# Altium PCB catt.PcbDoc
Units mm, origin at the board's own origin, x right, y up, seen from the top; angles counter-clockwise.
Board outline 65 x 56.5 mm, 2 copper layers (Top Layer, Bottom Layer); 44 components, 38 nets, 187 pads, 21 vias.
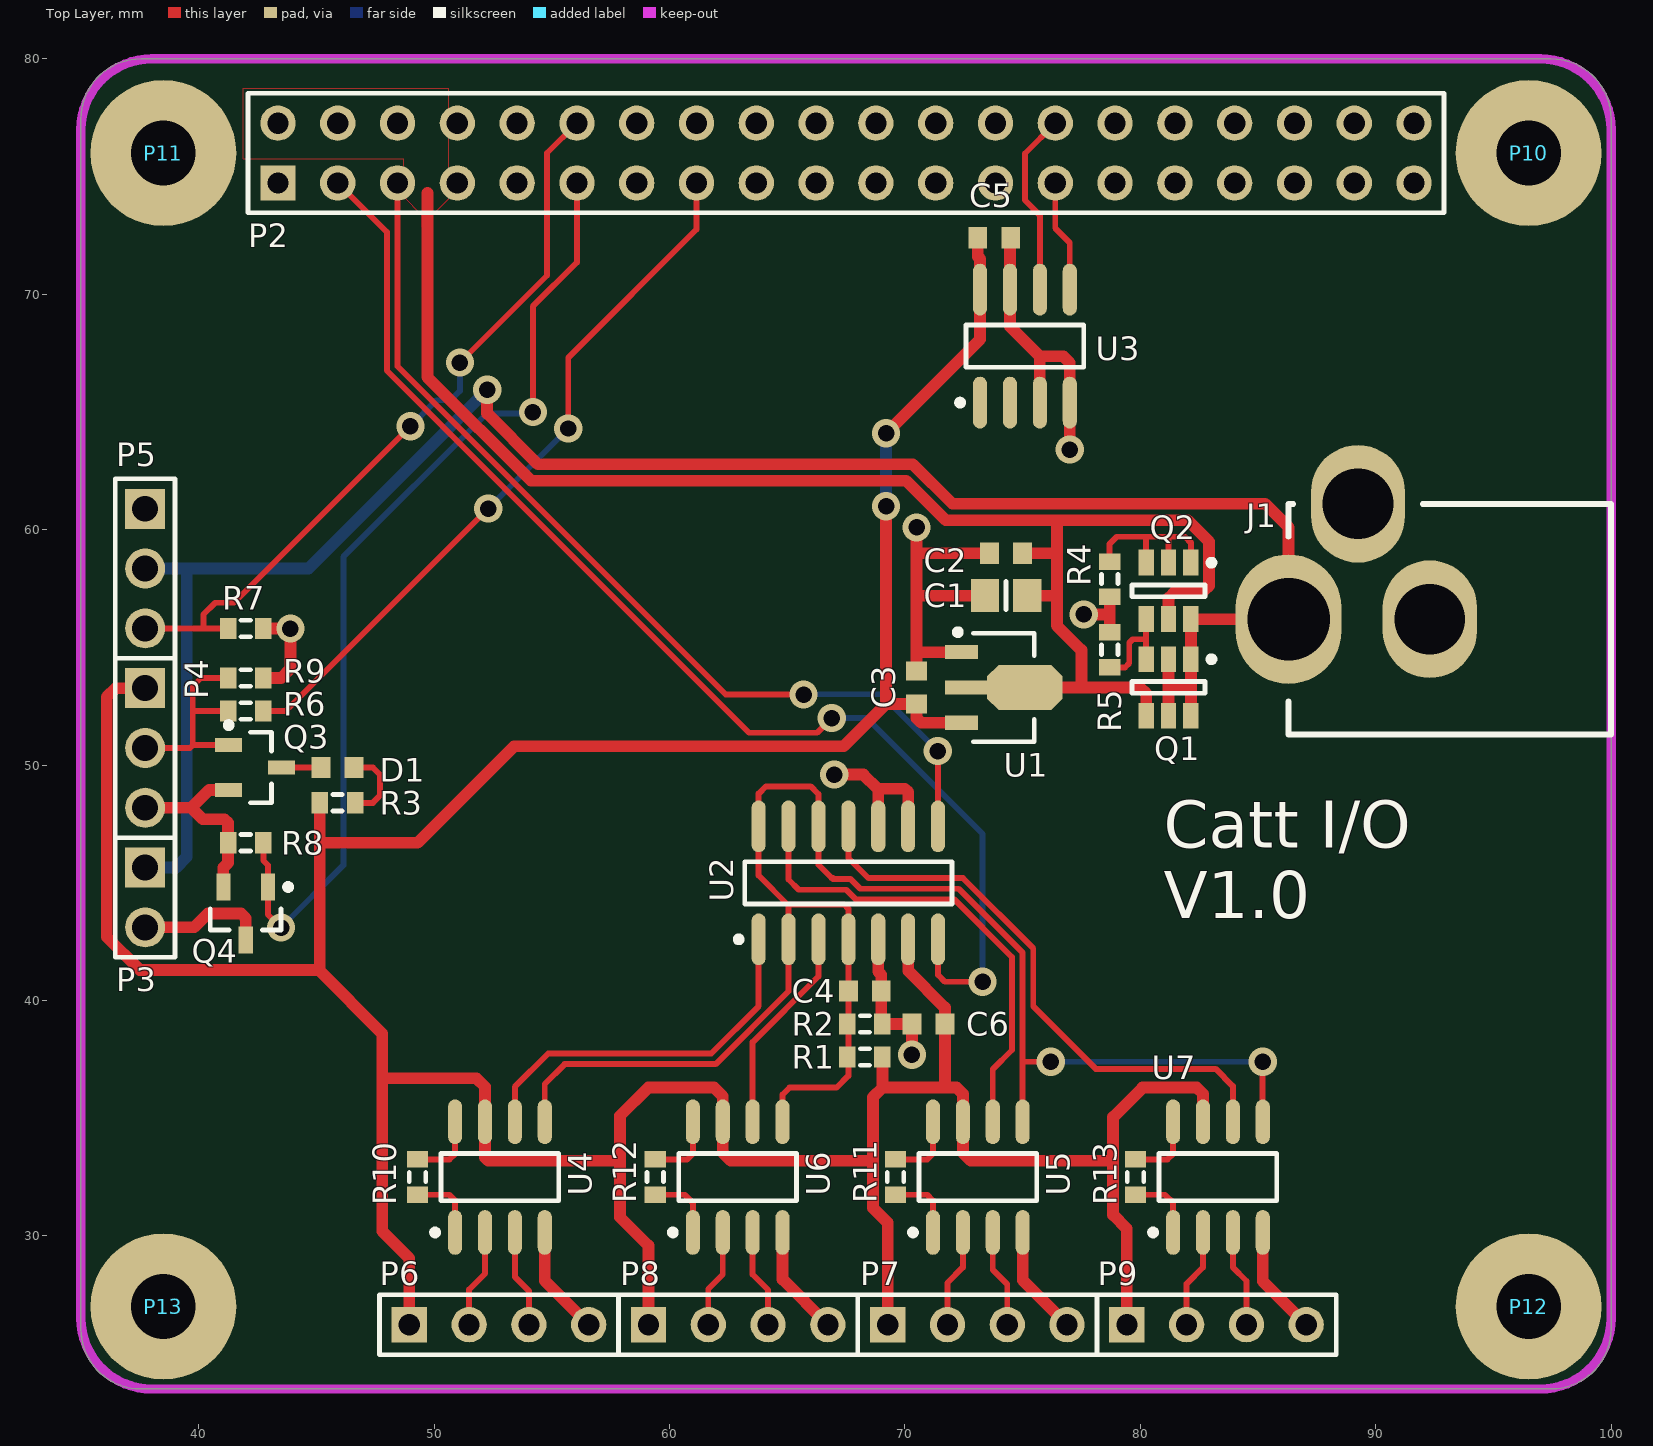
[diagram p0: Top Layer view]
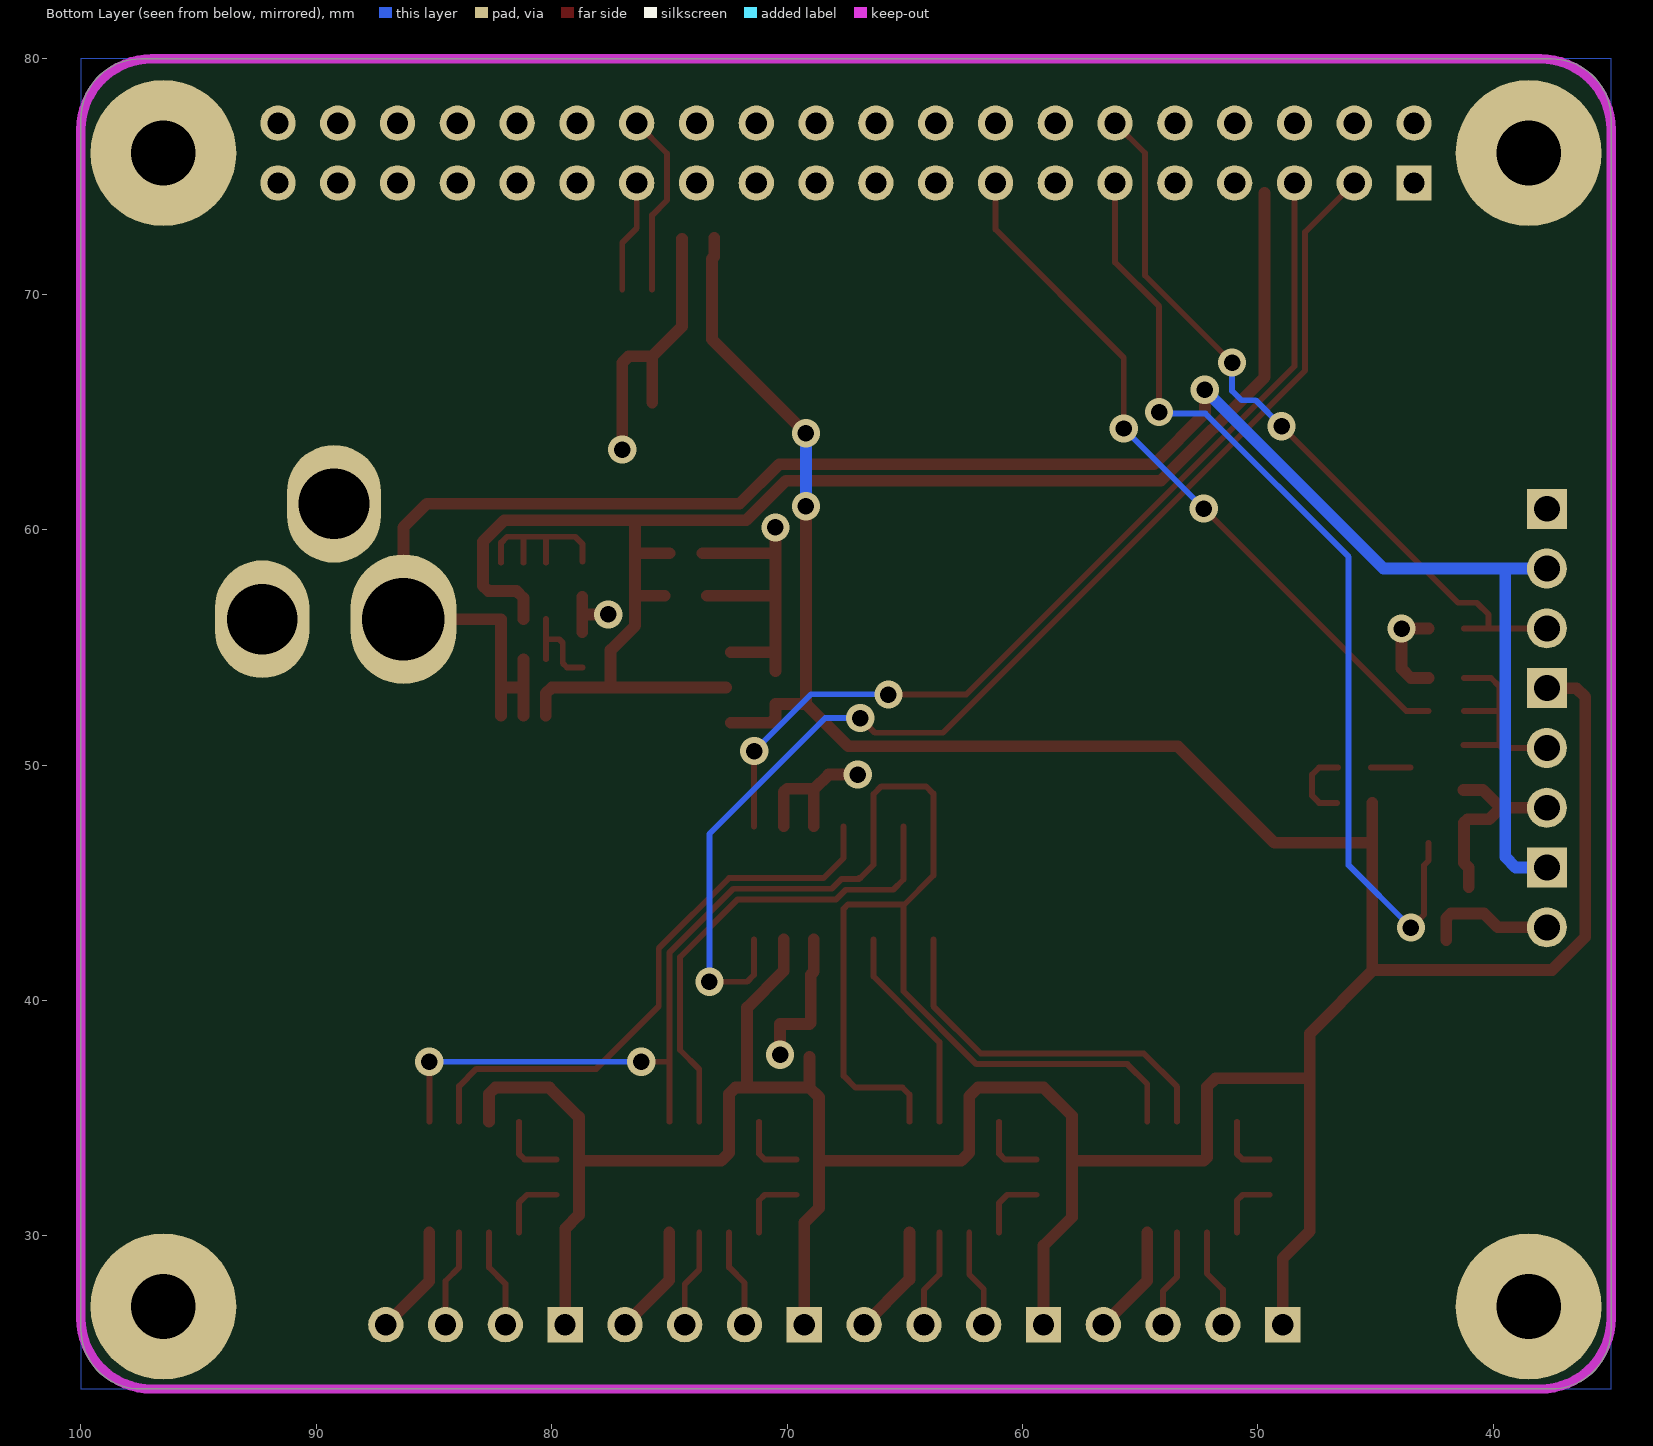
[diagram p1: Bottom Layer view, seen from below]

## Layer stack, top to bottom
Top Layer: signal copper 0.0356
Dielectric: dielectric 0.32, FR-4, Dk 4.8
Bottom Layer: signal copper 0.0356

## Board outline
35,50 35,77.46 cw(c37.54,77.46) 37.54,80 97.46,80 cw(c97.46,77.46) 100,77.46 100,26.04 cw(c97.46,26.04) 97.46,23.5 37.54,23.5 cw(c37.54,26.04) 35,26.04 35,50

## Design rules (kind name [scope] priority, off if disabled: settings)
AssemblyTestPointUsage [All] p0: scope1count=1 scope1_0_kind=Board scope1_0_value=Board scope2count=1 scope2_0_kind=Board scope2_0_value=Board commentlength=0
AssemblyTestpoint [All] p0: scope1count=1 scope1_0_kind=Board scope1_0_value=Board scope2count=1 scope2_0_kind=Board scope2_0_value=Board commentlength=0
Clearance Clearance_1 [All] p0: scope1count=1 scope1_0_kind=Layer scope1_0_value=TOP scope2count=1 scope2_0_kind=Board scope2_0_value=Board commentlength=0 gap=0.4
Clearance [All] p0: scope1count=1 scope1_0_kind=Board scope1_0_value=Board scope2count=1 scope2_0_kind=Board scope2_0_value=Board commentlength=0 gap=0.2
Clearance Clearance_1 [OnLayer('Mechanical 1')] p1: gap=0.4
Clearance [All] p2: gap=0.2
ComponentClearance [All] p0 off: scope1count=1 scope1_0_kind=Board scope1_0_value=Board scope2count=1 scope2_0_kind=Board scope2_0_value=Board commentlength=0 gap=0.254 collisioncheckmode=3
ComponentClearance [All] p1 off: gap=0.254 collisioncheckmode=3 verticalgap=0.254 showdistances=FALSE
DiffPairsRouting [All] p0: scope1count=1 scope1_0_kind=Board scope1_0_value=Board scope2count=1 scope2_0_kind=Board scope2_0_value=Board commentlength=0
FabricationTestPointUsage [All] p0: scope1count=1 scope1_0_kind=Board scope1_0_value=Board scope2count=1 scope2_0_kind=Board scope2_0_value=Board commentlength=0 valid=0 allowmultiple=FALSE
FabricationTestpoint [All] p0: scope1count=1 scope1_0_kind=Board scope1_0_value=Board scope2count=1 scope2_0_kind=Board scope2_0_value=Board commentlength=0 side=3 testpointundercomponent=TRUE minsize=1.016 maxsize=2.54 preferedsize=1.524 minholesize=0 maxholesize=1.016 preferedholesize=0.813 testpointgrid=0.025
FanoutControl Fanout_Default [All] p0: scope1count=1 scope1_0_kind=Board scope1_0_value=Board scope2count=1 scope2_0_kind=Board scope2_0_value=Board commentlength=30 // Fanout_Default (Default Rule)
FanoutControl Fanout_Small [All] p0 off: scope1count=1 scope1_0_kind=Board scope1_0_value=Board scope2count=1 scope2_0_kind=Board scope2_0_value=Board commentlength=84 // Protel DXP Scope 1 Expression Was: (CompPinCount < 5)   Fanout_Small (Default Rule)
FanoutControl Fanout_SOIC [All] p0 off: scope1count=1 scope1_0_kind=Board scope1_0_value=Board scope2count=1 scope2_0_kind=Board scope2_0_value=Board commentlength=71 // Protel DXP Scope 1 Expression Was: IsSOIC   Fanout_SOIC (Default Rule)
FanoutControl Fanout_LCC [All] p0 off: scope1count=1 scope1_0_kind=Board scope1_0_value=Board scope2count=1 scope2_0_kind=Board scope2_0_value=Board commentlength=69 // Protel DXP Scope 1 Expression Was: IsLCC   Fanout_LCC (Default Rule)
FanoutControl Fanout_BGA [All] p0 off: scope1count=1 scope1_0_kind=Board scope1_0_value=Board scope2count=1 scope2_0_kind=Board scope2_0_value=Board commentlength=69 // Protel DXP Scope 1 Expression Was: IsBGA   Fanout_BGA (Default Rule)
Height [All] p0: scope1count=1 scope1_0_kind=Board scope1_0_value=Board scope2count=1 scope2_0_kind=Board scope2_0_value=Board commentlength=0
HoleSize [All] p0: scope1count=1 scope1_0_kind=Board scope1_0_value=Board scope2count=1 scope2_0_kind=Board scope2_0_value=Board commentlength=0 absolutevalues=TRUE maxlimit=3 minlimit=0.3 maxpercent=80.000 minpercent=20.000
HoleSize [All] p1: absolutevalues=TRUE maxlimit=3 minlimit=0.3 maxpercent=80.000 minpercent=20.000
HoleToHoleClearance [All] p0: scope1count=1 scope1_0_kind=Board scope1_0_value=Board scope2count=1 scope2_0_kind=Board scope2_0_value=Board commentlength=0
LayerPairs [All] p0: scope1count=1 scope1_0_kind=Board scope1_0_value=Board scope2count=1 scope2_0_kind=Board scope2_0_value=Board commentlength=0 enforce=TRUE
MinimumSolderMaskSliver [All] p0: scope1count=1 scope1_0_kind=Board scope1_0_value=Board scope2count=1 scope2_0_kind=Board scope2_0_value=Board commentlength=0
NetAntennae [All] p0: scope1count=1 scope1_0_kind=Board scope1_0_value=Board scope2count=1 scope2_0_kind=Board scope2_0_value=Board commentlength=0
PasteMaskExpansion [All] p0: scope1count=1 scope1_0_kind=Board scope1_0_value=Board scope2count=1 scope2_0_kind=Board scope2_0_value=Board commentlength=0 expansion=0
PlaneClearance [All] p0: scope1count=1 scope1_0_kind=Board scope1_0_value=Board scope2count=1 scope2_0_kind=Board scope2_0_value=Board commentlength=0 clearance=0.5
PlaneClearance [All] p1: clearance=0.5
PlaneConnect [All] p0: scope1count=1 scope1_0_kind=Board scope1_0_value=Board scope2count=1 scope2_0_kind=Board scope2_0_value=Board commentlength=0 planeconnectstyle=Relief reliefexpansion=0.5 reliefentries=4 reliefconductorwidth=0.25 reliefairgap=0.25
PlaneConnect [All] p1: planeconnectstyle=Relief reliefexpansion=0.5 reliefentries=4 reliefconductorwidth=0.25 reliefairgap=0.25
PolygonConnect [All] p0: scope1count=1 scope1_0_kind=Board scope1_0_value=Board scope2count=1 scope2_0_kind=Board scope2_0_value=Board commentlength=0 connectstyle=Relief reliefconductorwidth=0.3 reliefentries=4 polygonreliefangle="90 Angle"
PolygonConnect [All] p1: connectstyle=Relief reliefconductorwidth=0.3 reliefentries=4 polygonreliefangle="90 Angle" airgapwidth=0.3
RoomDefinition catt [All] p0: scope1count=1 scope1_0_kind=ComponentClass scope1_0_value=catt scope2count=1 scope2_0_kind=Board scope2_0_value=Board commentlength=0 region_x1=13582677 region_y1=8858268 region_x2=39763780 region_y2=31889764 confinementstyle=ConfineIn
RoomDefinition catt [InComponentClass('catt')] p1: confinementstyle=ConfineIn formatcopy=TRUE lockcomponents=FALSE outline 34.5,22.5 101,22.5 101,81 34.5,81
RoutingCorners [All] p0: scope1count=1 scope1_0_kind=Board scope1_0_value=Board scope2count=1 scope2_0_kind=Board scope2_0_value=Board commentlength=0 cornerstyle=Round minsetback=3 maxsetback=3
RoutingCorners [All] p1: cornerstyle=Round minsetback=3 maxsetback=3
RoutingLayers [All] p0: scope1count=1 scope1_0_kind=Board scope1_0_value=Board scope2count=1 scope2_0_kind=Board scope2_0_value=Board commentlength=0 top layer=Automatic bottom layer=Automatic
RoutingPriority [All] p0: scope1count=1 scope1_0_kind=Board scope1_0_value=Board scope2count=1 scope2_0_kind=Board scope2_0_value=Board commentlength=0
RoutingTopology [All] p0: scope1count=1 scope1_0_kind=Board scope1_0_value=Board scope2count=1 scope2_0_kind=Board scope2_0_value=Board commentlength=0 topology=Shortest
RoutingVias [All] p0: scope1count=1 scope1_0_kind=Board scope1_0_value=Board scope2count=1 scope2_0_kind=Board scope2_0_value=Board commentlength=0 holewidth=0.7 width=1.2 viastyle="Through Hole" minholewidth=0.7 minwidth=1.2 maxholewidth=0.7 maxwidth=1.2
RoutingVias [All] p1: holewidth=0.7 width=1.2 viastyle="Through Hole" minholewidth=0.7 minwidth=1.2 maxholewidth=0.7 maxwidth=1.2
ShortCircuit [All] p0: scope1count=1 scope1_0_kind=Board scope1_0_value=Board scope2count=1 scope2_0_kind=Board scope2_0_value=Board commentlength=0 allowed=FALSE
SilkToSilkClearance [All] p0: scope1count=1 scope1_0_kind=Board scope1_0_value=Board scope2count=1 scope2_0_kind=Board scope2_0_value=Board commentlength=0
SilkToSilkClearance [All] p1: silktosilkclearance=0.178
SilkToSolderMaskClearance [All] p0 off: scope1count=1 scope1_0_kind=Board scope1_0_value=Board scope2count=1 scope2_0_kind=Board scope2_0_value=Board commentlength=44 // Protel DXP Scope 1 Expression Was: IsPad
SilkToSolderMaskClearance [IsPad] p1: minsilkscreentomaskgap=0.178 clearancetoexposedcopper=TRUE
SolderMaskExpansion [All] p0: scope1count=1 scope1_0_kind=Board scope1_0_value=Board scope2count=1 scope2_0_kind=Board scope2_0_value=Board commentlength=0 expansion=0.1
SolderMaskExpansion [All] p1: expansion=0.1
UnRoutedNet [All] p0: scope1count=1 scope1_0_kind=Board scope1_0_value=Board scope2count=1 scope2_0_kind=Board scope2_0_value=Board commentlength=0
Width Width-power [All] p0 off: scope1count=1 scope1_0_kind=Board scope1_0_value=Board scope2count=1 scope2_0_kind=Board scope2_0_value=Board commentlength=101 maxlimit=1 minlimit=0.3 preferedwidth=0.5 // Protel DXP Scope 1 Expression Was: (InNet('GND') OR InNet('V5V') OR InNet('Vin') OR InNet('VCC'))
Width [All] p0: scope1count=1 scope1_0_kind=Board scope1_0_value=Board scope2count=1 scope2_0_kind=Board scope2_0_value=Board commentlength=0 maxlimit=2 minlimit=0.2 preferedwidth=0.25
Width Width-power [(InNet('GND') OR InNet('V5V') OR InNet('Vin') OR InNet('VCC'))] p1: maxlimit=1 minlimit=0.3 preferedwidth=0.5
Width [All] p2: maxlimit=2 minlimit=0.2 preferedwidth=0.25
21 further rules are at their usual default settings.

## Components (designator, comment, footprint, x,y, rotation, side; value= is the part's Value field where it differs from the comment)
C1 "Cap Pol2" 6-0805_N 74.3,57.2 r180 top
C2 "Cap" 1608[0603] 74.3,59 r0 top
C3 "Cap" 1608[0603] 70.5,53.3 r270 top
C4 "Cap" 1608[0603] 68.3,40.4 r180 top
C5 "Cap" 1608[0603] 73.8,72.4 r180 top
C6 "Cap" 1608[0603] 71,39 r0 top
D1 "LED1" 1608[0603] 45.9,49.9 r180 top
J1 "PWR2.5" MJ-180PH 100,56.2 r180 top
P2 "Header 20X2" HDR2X20 43.37,74.73 r0 top
P3 "Header 2" HDR1X2 37.73,45.65 r270 top
P4 "Header 3" HDR1X3 37.73,53.27 r270 top
P5 "Header 3" HDR1X3 37.73,60.89 r270 top
P6 "Header 4" HDR1X4 48.95,26.23 r0 top
P7 "Header 4" HDR1X4 69.27,26.23 r0 top
P8 "Header 4" HDR1X4 59.11,26.23 r0 top
P9 "Header 4" HDR1X4 79.43,26.23 r0 top
P10 "HOLE" HOLE#1 96.5,76.5 r0 top
P11 "HOLE" HOLE#1 38.5,76.5 r0 top
P12 "HOLE" HOLE#2 96.5,27 r0 top
P13 "HOLE" HOLE#3 39,27.5 r0 top
Q1 "FDC365P" SOT23-6 81.2,53.3 r270 top
Q2 "DMMT5401" SOT23-6 81.2,57.4 r270 top
Q3 "FDN335N" SOT-23 42.4,49.9 r0 top
Q4 "FDN335N" SOT-23 42,43.7 r270 top
R1 "Res2" J1-0603 68.3,37.6 r0 top
R2 "Res2" J1-0603 68.3,39 r180 top
R3 "Res2" J1-0603 45.9,48.4 r180 top
R4 "Res2" J1-0603 78.7,57.9 r90 top
R5 "Res2" J1-0603 78.7,54.9 r270 top
R6 "Res2" J1-0603 42,52.3 r0 top
R7 "Res2" J1-0603 42,55.8 r0 top
R8 "Res2" J1-0603 42,46.7 r180 top
R9 "Res2" J1-0603 42,53.7 r0 top
R10 "Res2" J1-0603 49.3,32.5 r270 top
R11 "Res2" J1-0603 69.6,32.5 r270 top
R12 "Res2" J1-0603 59.4,32.5 r270 top
R13 "Res2" J1-0603 79.8,32.5 r270 top
U1 "MCP1702T-3302E/MB" SOT-89-MB3_N 74.2,53.3 r0 top
U2 "MCP3424-E/SL" SOIC-SL14_N 67.6,45 r90 top
U3 "AT24C08BN-SP25-T" 8S1_N 75.1,67.8 r90 top
U4 "AD620AN" SO-8_L 52.8,32.5 r90 top
U5 "AD620AN" SO-8_L 73.1,32.5 r90 top
U6 "AD620AN" SO-8_L 62.9,32.5 r90 top
U7 "AD620AN" SO-8_L 83.3,32.5 r90 top

## Footprints (in the part's own frame and the unit in brackets; to place one, negate y for a bottom-side part, rotate by r counter-clockwise, add the part's x,y. Pads: shape width x height; smd on the part's side, far side on the other; paste and mask are expansions set on the pad)
6-0805_N [mm] "Chip Resistor, Body 2.0x1.2mm, IPC Medium Density"
  rect 1.2x1.4 smd: 1(-0.9,0) 2(0.9,0)
  silkscreen extent 0,-0.6 0,0.6
8S1_N [mm] "SOIC, 8-Leads, Body 4.9x3.9mm, Pitch 1.27mm, IPC Medium Density"
  oval 2.2x0.6 smd: 1(-2.4,1.905) 2(-2.4,0.635) 3(-2.4,-0.635) 4(-2.4,-1.905) 5(2.4,-1.905) 6(2.4,-0.635) 7(2.4,0.635) 8(2.4,1.905)
  silkscreen extent -2.52,-2.5 0.9,2.88
1608[0603] [mm] "Chip Capacitor, Body 1.6x0.8mm, IPC High Density"
  rect 0.8x0.9 smd: 1(-0.7,0) 2(0.7,0)
HDR1X2 [mm] "Connector; Header; 2 Position"
  rect 1.7x1.7 hole 1.1: 1(0,0)
  round 1.7 hole 1.1: 2(2.54,0)
  silkscreen extent -1.27,-1.27 3.81,1.27
HDR1X3 [mm] "Connector; Header; 3 Position"
  rect 1.7x1.7 hole 1.1: 1(0,0)
  round 1.7 hole 1.1: 2(2.54,0) 3(5.08,0)
  silkscreen extent -1.27,-1.27 6.35,1.27
HDR1X4 [mm] "Connector; Header; 4 Position"
  rect 1.5x1.5 hole 0.9: 1(0,0)
  round 1.5 hole 0.9: 2(2.54,0) 3(5.08,0) 4(7.62,0)
  silkscreen extent -1.27,-1.27 8.89,1.27
HDR2X20 [mm] "Connector; Header; 20x2 Position"
  rect 1.5x1.5 hole 0.9: 1(0,0)
  round 1.5 hole 0.9: 2(0,2.54) 3(2.54,0) 4(2.54,2.54) 5(5.08,0) 6(5.08,2.54) 7(7.62,0) 8(7.62,2.54) 9(10.16,0) 10(10.16,2.54) 11(12.7,0) 12(12.7,2.54) 13(15.24,0) 14(15.24,2.54) 15(17.78,0) 16(17.78,2.54) 17(20.32,0) 18(20.32,2.54) 19(22.86,0) 20(22.86,2.54) 21(25.4,0) 22(25.4,2.54) 23(27.94,0) 24(27.94,2.54) 25(30.48,0) 26(30.48,2.54) 27(33.02,0) 28(33.02,2.54) 29(35.56,0) 30(35.56,2.54) 31(38.1,0) 32(38.1,2.54) 33(40.64,0) 34(40.64,2.54) 35(43.18,0) 36(43.18,2.54) 37(45.72,0) 38(45.72,2.54) 39(48.26,0) 40(48.26,2.54)
  silkscreen extent -1.27,-1.27 49.53,3.81
HOLE#1 [mm] "2.75mm mounting hole"
  round 6.2 hole 2.75: 0(0,-0.5)
HOLE#2 [mm] "2.75mm mounting hole"
  round 6.2 hole 2.75: 0(0,0)
HOLE#3 [mm] "2.75mm mounting hole"
  round 6.2 hole 2.75: 0(-0.5,-0.5)
J1-0603 [mm] "Chip Resistor, Body 1.6x0.8mm, IPC High Density"
  rect 0.7x0.9 smd: 1(-0.75,0) 2(0.75,0)
  silkscreen extent -0.2,-0.35 0.2,0.35
MJ-180PH [mm] "Socket, PCB, DC Power"
  oval 4.5x5.5 hole 3.5: 1(13.7,0)
  oval 4x5 hole 3: 2(10.75,-4.9) 3(7.7,0)
  silkscreen extent 0,-4.9 13.7,4.9
SO-8_L [mm] "SOIC, 8-Leads, Body 4.9x3.9mm, Pitch 1.27mm, IPC High Density"
  oval 1.9x0.6 smd: 1(-2.35,1.905) 2(-2.35,0.635) 3(-2.35,-0.635) 4(-2.35,-1.905) 5(2.35,-1.905) 6(2.35,-0.635) 7(2.35,0.635) 8(2.35,1.905)
  silkscreen extent -2.47,-2.5 1,2.88
SOIC-SL14_N [mm] "SOIC, 14-Leads, Body 8.7x3.9mm, Pitch 1.27mm, IPC Medium Density"
  oval 2.2x0.6 smd: 1(-2.4,3.81) 2(-2.4,2.54) 3(-2.4,1.27) 4(-2.4,0) 5(-2.4,-1.27) 6(-2.4,-2.54) 7(-2.4,-3.81) 8(2.4,-3.81) 9(2.4,-2.54) 10(2.4,-1.27) 11(2.4,0) 12(2.4,1.27) 13(2.4,2.54) 14(2.4,3.81)
  silkscreen extent -2.52,-4.4 0.9,4.78
SOT23-6 [mm] "SOT23, 6-Leads, Body 2.9x1.6mm, Pitch 0.95mm, Lead Span 2.7mm, IPC Medium Density"
  rect 1.1x0.65 smd: 1(-1.2,0.95) 2(-1.2,0) 3(-1.2,-0.95) 4(1.2,-0.95) 5(1.2,0) 6(1.2,0.95)
  silkscreen extent -1.32,-1.55 0.25,1.95
SOT-23 [mm] "SOT23, 3-Leads, Body 2.9x1.3mm, Pitch 0.95mm, Lead Span 2.5mm, IPC Medium Density"
  rect 1.15x0.6 smd: 1(-1.125,0.95) 2(-1.125,-0.95) 3(1.125,0)
  silkscreen extent -1.25,-1.5 0.7,1.92
SOT-89-MB3_N [mm] "SOT89, 3-Leads, Body 4.5x2.4 mm, Pitch 1.5mm, Lead Span 4.1mm, IPC Medium Density"
  rect 1.4x0.6 smd: 1(-1.8,1.5) 3(-1.8,-1.5)
  rect 1.8x0.6 smd: 2(-1.6,0)
  oct 3.2x1.9 smd: 2(0.9,0)
  silkscreen extent -2.07,-2.3 1.3,2.47

## Part data
C1: "Polarized Capacitor (Axial)"
C2 C3 C4 C5 C6: "Capacitor"
D1: "Typical RED GaAs LED"
J1: "Low Voltage Power Supply Connector"
P2: "Header, 20-Pin, Dual row"
P3: "Header, 2-Pin"
P4 P5: "Header, 3-Pin"
P6 P7 P8 P9: "Header, 4-Pin"
P10 P11 P12 P13: "Mountiong Hole"
Q1: "P-Channel PowerTrench® MOSFET"
Q2: "Matched PNP small signal transistor"
Q3 Q4: "N-Channel MOSFET"
R1 R2 R3 R4 R5 R6 R7 R8 R9 R10 R11 R12 R13: "Resistor"
U1: "250 mA Low Quiescent Current LDO Regulator, 3-Pin SOT-89, Extended Temperature, Tape and Reel"
U2: "18-Bit, 4-Channel Analog-to-Digital Converter with I2C Interface and On-Board Reference, 14-Pin SOIC 150mil, Extended Temperature"
U3: "8Kbit (1024 x 8), 2-wire Bus Automotive Serial EEPROM with Write Protect, 2.5V, 8-Pin SOIC, Tape & Reel"
U4 U5 U6 U7: "Low-Cost, Low-Power Instrumentation Amplifier"

## Via types
v1: diameter 1.2, hole 0.7, Top Layer to Bottom Layer, 21 vias

## Nets (pads, with @x,y where several pads share a name; then routed paths per layer and width w, separated by ;. In a path a pad name is that pad's centre, name@x,y a point inside that pad or via, vN(x,y) a via of type N, cw(c..) or ccw(c..) an arc to the next point about the centre after c; other vN are vias at no path point)
GND: C1.2 C2.1 C3.1 C4.1 C5.1 C6.1 J1.2 J1.3 P2.6 P2.9 P2.14 P2.20 P2.25 P2.30 P2.34 P2.39 P4.3 P5.1 P6.4 P7.4 P8.4 P9.4 P10.0 P11.0 P12.0 P13.0 Q3.2 Q4.2 R2.1 R4.1 R5.1 R7.2 R8.2 R9.2 U1.1 U2.5 U2.9 U2.10 U3.3 U3.4 U3.7 U4.4 U5.4 U6.4 U7.4 | length 73.9
  Top Layer w0.5: P4.3 39.69,48.19 ; Q4.2 41.05,45.65 41.25,45.85 R8.2 41.25,47.55 41.1,47.7 40.18,47.7 39.69,48.19 ; Q3.2 40.45,48.95 39.69,48.19 ; R9.2 43.5,53.7 43.9,54.1 v1(43.9,55.8) R7.2 ; U4.4 54.705,28.095 P6.4 ; U6.4 64.805,28.155 P8.4 ; v1(67,49.6) 68.24,49.6 68.84,49 ; U2.5 68.87,41.23 69,41.1 C4.1 69,39.05 R2.1 C6.1 v1(70.3,37.7) ; U2.10 68.87,48.97 68.84,49 ; U2.9 70.14,48.86 70,49 68.84,49 ; C3.1 70.5,54.8 ; 70.5,57.2 C1.2 ; v1(70.5,60.1) 70.5,59 ; U1.1 70.5,54.8 ; C2.1 70.5,59 ; C5.1@74.465,72.365 U3.7 74.465,68.635 75.735,67.365 ; U5.4 75.005,28.115 P7.4 ; U3.3 75.735,67.365 ; v1(77.005,63.405) U3.4 77.005,67.095 76.735,67.365 75.735,67.365 ; v1(77.6,56.4) 78.7,56.4 ; R5.1 78.7,56.4 ; R4.1 78.7,56.4 ; U7.4 85.205,28.075 P9.4 ; 70.5,54.8 70.5,59
  Bottom Layer w0.25: v1@66.7,49.9 v1(67,49.6) ; v1@76.9,63.3 v1(77.005,63.405)
ID_SC: P2.28 U3.6 | length 7.9
  Top Layer w0.25: U3.6 75.735,73.365 75.1,74 75.1,75.98 P2.28
ID_SD: P2.27 U3.5 | length 5.3
  Top Layer w0.25: P2.27@76.39,75.23 76.39,72.81 77.005,72.195 U3.5
IR: P2.11 Q4.1 R8.1 | length 42.4
  Top Layer w0.25: R8.1 42.75,45.95 42.95,45.75 Q4.1 42.95,43.65 v1(43.5,43.1) ; v1(54.2,65) 54.2,69.487 56.07,71.357 P2.11@56.07,75.23
  Bottom Layer w0.25: v1(43.5,43.1) 46.15,45.75 46.15,48.9 46.15,58.85 52.23,64.93 54.13,64.93 v1(54.2,65)
NetD1_1: D1.1 R3.1 | length 3.3
  Top Layer w0.25: D1.1 47.4,49.9 47.7,49.6 47.7,48.7 47.4,48.4 R3.1
NetD1_2: D1.2 Q3.3 | length 1.7
  Top Layer w0.25: Q3.3 D1.2
NetP3_2: P3.2 Q4.3 | length 5.5
  Top Layer w0.5: P3.2 39.81,43.11 40.4,43.7 41.8,43.7 42,43.5 Q4.3
NetP4_2: P4.2 Q3.1 R6.1 R9.1 | length 9.2
  Top Layer w0.25: P4.2 39.63,50.73 39.75,50.85 ; R6.1 39.75,52.3 ; R9.1 40.1,53.7 39.75,53.35 39.75,52.3 ; Q3.1 39.75,50.85 ; 39.75,50.85 39.75,52.3
NetP6_2: P6.2 U4.2 | length 4.2
  Top Layer w0.25: P6.2 51.49,27.725 52.165,28.4 U4.2
NetP6_3: P6.3 U4.3 | length 4.2
  Top Layer w0.25: U4.3 53.435,28.265 54.03,27.67 P6.3
NetP7_2: P7.2 U5.2 | length 4.2
  Top Layer w0.25: P7.2 71.81,28.01 72.465,28.665 U5.2
NetP7_3: P7.3 U5.3 | length 4.2
  Top Layer w0.25: U5.3 73.735,28.565 74.35,27.95 P7.3
NetP8_2: P8.2 U6.2 | length 4.2
  Top Layer w0.25: P8.2 61.65,27.75 62.265,28.365 U6.2
NetP8_3: P8.3 U6.3 | length 4.2
  Top Layer w0.25: U6.3 63.535,28.365 64.19,27.71 P8.3
NetP9_2: P9.2 U7.2 | length 4.2
  Top Layer w0.25: P9.2 81.97,27.97 82.665,28.665 U7.2
NetP9_3: P9.3 U7.3 | length 4.2
  Top Layer w0.25: U7.3 83.935,28.665 84.51,28.09 P9.3
NetQ1_3: Q1.3 Q2.4 R5.2 | length 4.3
  Top Layer w0.25: R5.2 79.35,54.15 79.531,54.331 79.531,55.202 79.679,55.35 80.25,55.35 ; Q1.3 80.25,55.35 ; Q2.4 80.25,55.35
NetQ2_1: Q2.1 Q2.2 Q2.3 R4.2 | length 7.5
  Top Layer w0.25: R4.2 78.7,59.4 79,59.7 80.25,59.7 ; Q2.3 80.25,59.7 ; Q2.2 81.2,59.7 ; Q2.1 82.15,59.45 81.9,59.7 81.2,59.7 ; 80.25,59.7 81.2,59.7
NetR10_1: R10.1 U4.8 | length 2.9
  Top Layer w0.25: R10.1@49.5,33.25 50.65,33.25 50.895,33.495 U4.8
NetR10_2: R10.2 U4.1 | length 2.9
  Top Layer w0.25: R10.2@49.5,31.75 50.65,31.75 50.895,31.505 U4.1
NetR11_1: R11.1 U5.8 | length 3.1
  Top Layer w0.25: R11.1 70.95,33.25 71.195,33.495 U5.8
NetR11_2: R11.2 U5.1 | length 3.1
  Top Layer w0.25: R11.2 70.95,31.75 71.195,31.505 U5.1
NetR12_1: R12.1 U6.8 | length 3.1
  Top Layer w0.25: R12.1 60.75,33.25 60.995,33.495 U6.8
NetR12_2: R12.2 U6.1 | length 3
  Top Layer w0.25: R12.2 60.65,31.75 60.995,31.405 U6.1
NetR13_1: R13.1 U7.8 | length 3.1
  Top Layer w0.25: R13.1 81.15,33.25 81.395,33.495 U7.8
NetR13_2: R13.2 U7.1 | length 3
  Top Layer w0.25: R13.2 81.05,31.75 81.395,31.405 U7.1
PIRS: P2.15 R6.2 | length 30.7
  Top Layer w0.25: R6.2 43.7,52.3 v1(52.3,60.9) ; v1(55.7,64.3) 55.7,67.308 61.15,72.758 P2.15@61.15,75.23
  Bottom Layer w0.25: v1(52.3,60.9) v1@55.4,64
SCL: P2.5 U2.8 | length 41.2
  Top Layer w0.25: P2.5@48.45,75.23 48.45,66.944 62.394,53 v1(65.7,53) ; v1(71.4,50.6) 71.41,50.59 U2.8
  Bottom Layer w0.25: v1(65.7,53) 65.714,53.014 68.986,53.014 v1(71.4,50.6)
SDA: P2.3 U2.7 | length 52.6
  Top Layer w0.25: P2.3 48,72.64 48,66.757 63.382,51.375 66.275,51.375 v1(66.9,52) ; U2.7 71.41,41.09 71.7,40.8 v1(73.3,40.8)
  Bottom Layer w0.25: v1(66.9,52) 68.382,52 73.3,47.082 v1(73.3,40.8)
SERVO: P2.12 P5.3 R7.1 | length 32.4
  Top Layer w0.25: P5.3 40.2,55.81 ; R7.1@41.24,55.81 40.2,55.81 ; v1(49,64.4) 41.5,56.9 40.7,56.9 40.2,56.4 40.2,55.81 ; v1(51.1,67.1) 54.8,70.8 54.8,76 P2.12
  Bottom Layer w0.25: v1(49,64.4) 50.1,65.5 50.7,65.5 51.1,65.9 v1(51.1,67.1)
V5V: C1.1 C2.2 P2.2 P2.4 Q1.4 Q2.5 U1.2 | length 67.5
  Top Layer w0.5: 49.72,74.3 49.72,66.487 54.122,62.085 70.05,62.085 71.734,60.4 82.013,60.4 82.925,59.488 82.925,57.625 82.7,57.4 81.5,57.4 81.2,57.1 Q2.5 ; U1.2@72.6,53.3 U1.2@75.1,53.3 ; C2.2 76.461,59 ; U1.2@75.104,53.296 77.5,53.296 ; C1.1 76.461,57.2 ; 76.461,60.361 76.461,55.928 77.5,54.889 77.5,53.296 ; Q1.4 80.25,53.05 80.004,53.296 77.5,53.296
VCC: C3.2 C5.2 C6.2 P4.1 P6.1 P7.1 P8.1 P9.1 R1.2 R3.2 U1.3 U2.6 U3.8 U4.7 U5.7 U6.7 U7.7 | length 179.8
  Top Layer w0.5: P4.1 36.47,53.27 36.1,52.9 36.1,42.7 37.5,41.3 45.1,41.3 ; R3.2 45.15,46.7 ; P6.1 48.95,29.05 47.8,30.2 47.8,36.7 ; P8.1 59.11,29.59 57.9,30.8 57.9,33.2 ; R1.2 69.05,36.3 ; v1(69.2,61) 69.2,52.6 ; v1(69.2,64.1) 73.195,68.095 U3.8 73.195,71.505 73.1,71.6 C5.2 ; P7.1 69.27,30.567 68.646,31.191 68.646,33.2 ; U2.6 70.14,41.26 71.7,39.7 C6.2 71.7,36.304 ; U1.3 70.7,51.8 70.5,52 C3.2 69.2,52.6 ; P9.1 79.43,30.312 78.846,30.896 78.846,33.2 ; U7.7 82.665,36.035 82.396,36.304 80.1,36.304 78.846,35.05 78.846,33.2 ; 45.1,41.3 47.8,38.6 47.8,36.7 ; 45.1,41.3 45.15,41.35 45.15,46.7 ; 45.15,46.7 49.3,46.7 53.4,50.8 67.4,50.8 69.2,52.6 ; 47.8,36.7 51.8,36.7 52.165,36.335 U4.7 52.165,33.335 52.3,33.2 57.9,33.2 ; 57.9,33.2 57.9,35.104 59.1,36.304 61.896,36.304 62.265,35.935 U6.7 62.265,33.535 62.6,33.2 68.646,33.2 ; 68.646,33.2 68.646,35.896 69.05,36.3 ; 69.05,36.3 69.054,36.304 72.196,36.304 72.465,36.035 U5.7 72.465,33.535 72.8,33.2 78.846,33.2
  Bottom Layer w0.5: v1(69.2,61) v1(69.2,64.1)
VIN: J1.1 P3.1 P5.2 Q1.1 Q1.2 Q1.5 Q1.6 Q2.6 | length 84.4
  Top Layer w0.5: v1(52.256,65.944) 52.256,64.941 54.412,62.785 70.339,62.785 72.024,61.1 85.3,61.1 86.3,60.1 J1.1 Q2.6 Q1.1 82.15,53.3 ; Q1.5 81.2,53.3 ; Q1.2 81.2,53.3 ; Q1.6 82.15,53.3 ; 81.2,53.3 82.15,53.3
  Bottom Layer w0.5: P3.1 39.05,45.65 39.5,46.1 39.5,58.35 ; P5.2 39.5,58.35 ; v1(52.256,65.944) 44.662,58.35 39.5,58.35
VLC0: U2.1 U4.6 | length 16.1
  Top Layer w0.25: U4.6 53.435,36.335 54.85,37.75 61.777,37.75 63.79,39.763 U2.1
VLC1: U2.3 U6.6 | length 8.9
  Top Layer w0.25: U6.6 63.535,38.235 66.33,41.03 U2.3
VLC2: U2.11 U7.6 | length 24.7
  Top Layer w0.25: U2.11 67.6,46.055 68.455,45.2 72.473,45.2 75.455,42.218 75.455,39.753 78.108,37.1 83.2,37.1 83.935,36.365 U7.6
VLC3: U2.13 U5.6 | length 20.5
  Top Layer w0.25: U2.13 65.06,45.14 65.492,44.708 67.51,44.708 67.918,44.3 72.1,44.3 74.555,41.845 74.555,37.9 73.735,37.08 U5.6
VREF: C4.2 R1.1 R2.2 U2.2 U2.4 U2.12 U2.14 U4.5 U5.5 U6.5 U7.5 | length 72.5
  Top Layer w0.25: U4.5 54.705,36.455 55.55,37.3 61.964,37.3 65.06,40.396 U2.2 65.06,44.04 ; U6.5 64.805,36.005 65.1,36.3 67.1,36.3 67.6,36.8 C4.2 U2.4 67.6,43.9 67.421,44.079 65.099,44.079 65.06,44.04 ; 66.942,45.158 67.697,45.158 68.105,44.75 72.286,44.75 75.005,42.031 75.005,37.4 ; 66.942,45.212 66.888,45.212 66.33,45.77 U2.12 66.33,48.77 66,49.1 64.1,49.1 63.79,48.79 U2.14 63.79,45.31 65.06,44.04 ; U5.5 75.005,37.4 ; v1@75.9,37.4 75.005,37.4 ; v1(85.2,37.4) 85.2,34.855 U7.5
  Bottom Layer w0.25: v1@75.9,37.4 v1(85.2,37.4)
  other v1: 76.2,37.4
pads on no net: P2.1 P2.7 P2.8 P2.10 P2.13 P2.16 P2.17 P2.18 P2.19 P2.21 P2.22 P2.23 P2.24 P2.26 P2.29 P2.31 P2.32 P2.33 P2.35 P2.36 P2.37 P2.38 P2.40 U3.1 U3.2

## Polygon pours and split planes (outlines as drawn)
GND on Bottom Layer "Bottom Layer-No Net" (solid, pour order 2): 35,23.5 35,80 100,80 100,23.5
V5V on Top Layer "Bottom Layer-No Net" (solid, remove dead copper, pour order 5): 49.505,72.845 49.505,73.345 48.705,74.145 48.705,75.745 41.905,75.745 41.905,78.745 43.905,78.745 50.605,78.745 50.605,74.245 50.605,74.045 49.905,73.345 49.905,72.845 49.505,72.845

## Keep-outs
Keep-Out Layer:
  lines w0.4: 35,26.5 ccw(c38,26.5) 38,23.5 97,23.5 ccw(c97,26.5) 100,26.5 100,77 ccw(c97,77) 97,80 38,80 ccw(c38,77) 35,77 35,29.3 35,26.5

## Silkscreen, mask and mechanical layers (free items; w line width, h text height)
Top Overlay:
  text "Catt I/O" at 81,46.5 h2
  text "V1.0" at 81,43.5 h2
Mechanical 1:
  lines w0.2: 35,26.5 ccw(c38,26.5) 38,23.5 97,23.5 ccw(c97,26.5) 100,26.5 100,77 ccw(c97,77) 97,80 38,80 ccw(c38,77) 35,77 35,29.3 35,26.5

## Text inside footprints (layer, text, board x,y; h text height)
C6: Mechanical 13 "P13" at 35.992,31.42 h1